# Altium PCB ad_motor3.PcbDoc
Units mil, origin at the board's own origin, x right, y up, seen from the top; angles counter-clockwise.
Board outline 2558.74 x 2204.72 mil, 2 copper layers (Top Layer, Bottom Layer); 48 components, 62 nets, 206 pads, 58 vias.
Unrouted connection lines stored in the file: 1.
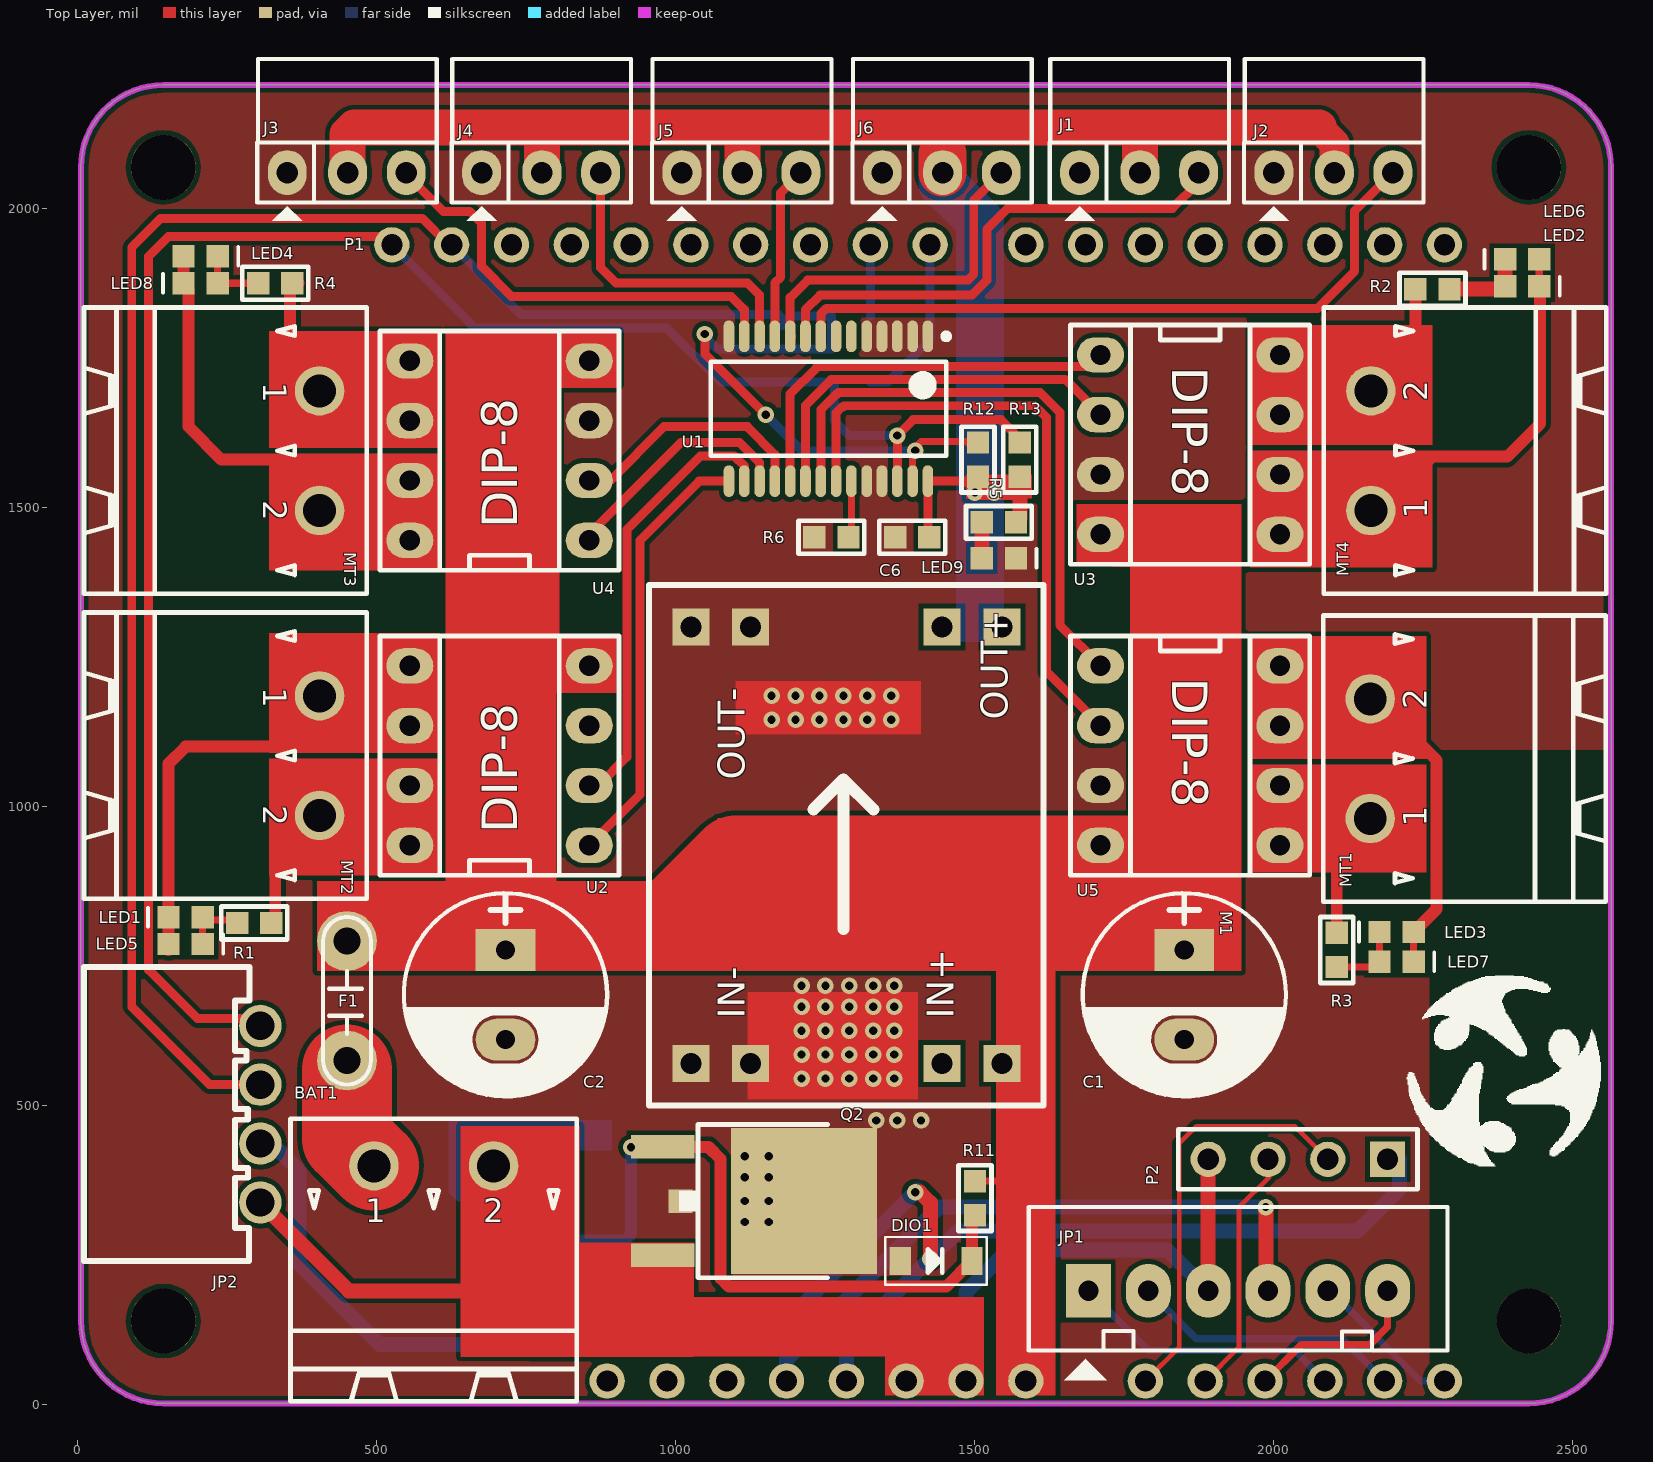
[diagram p0: Top Layer view]
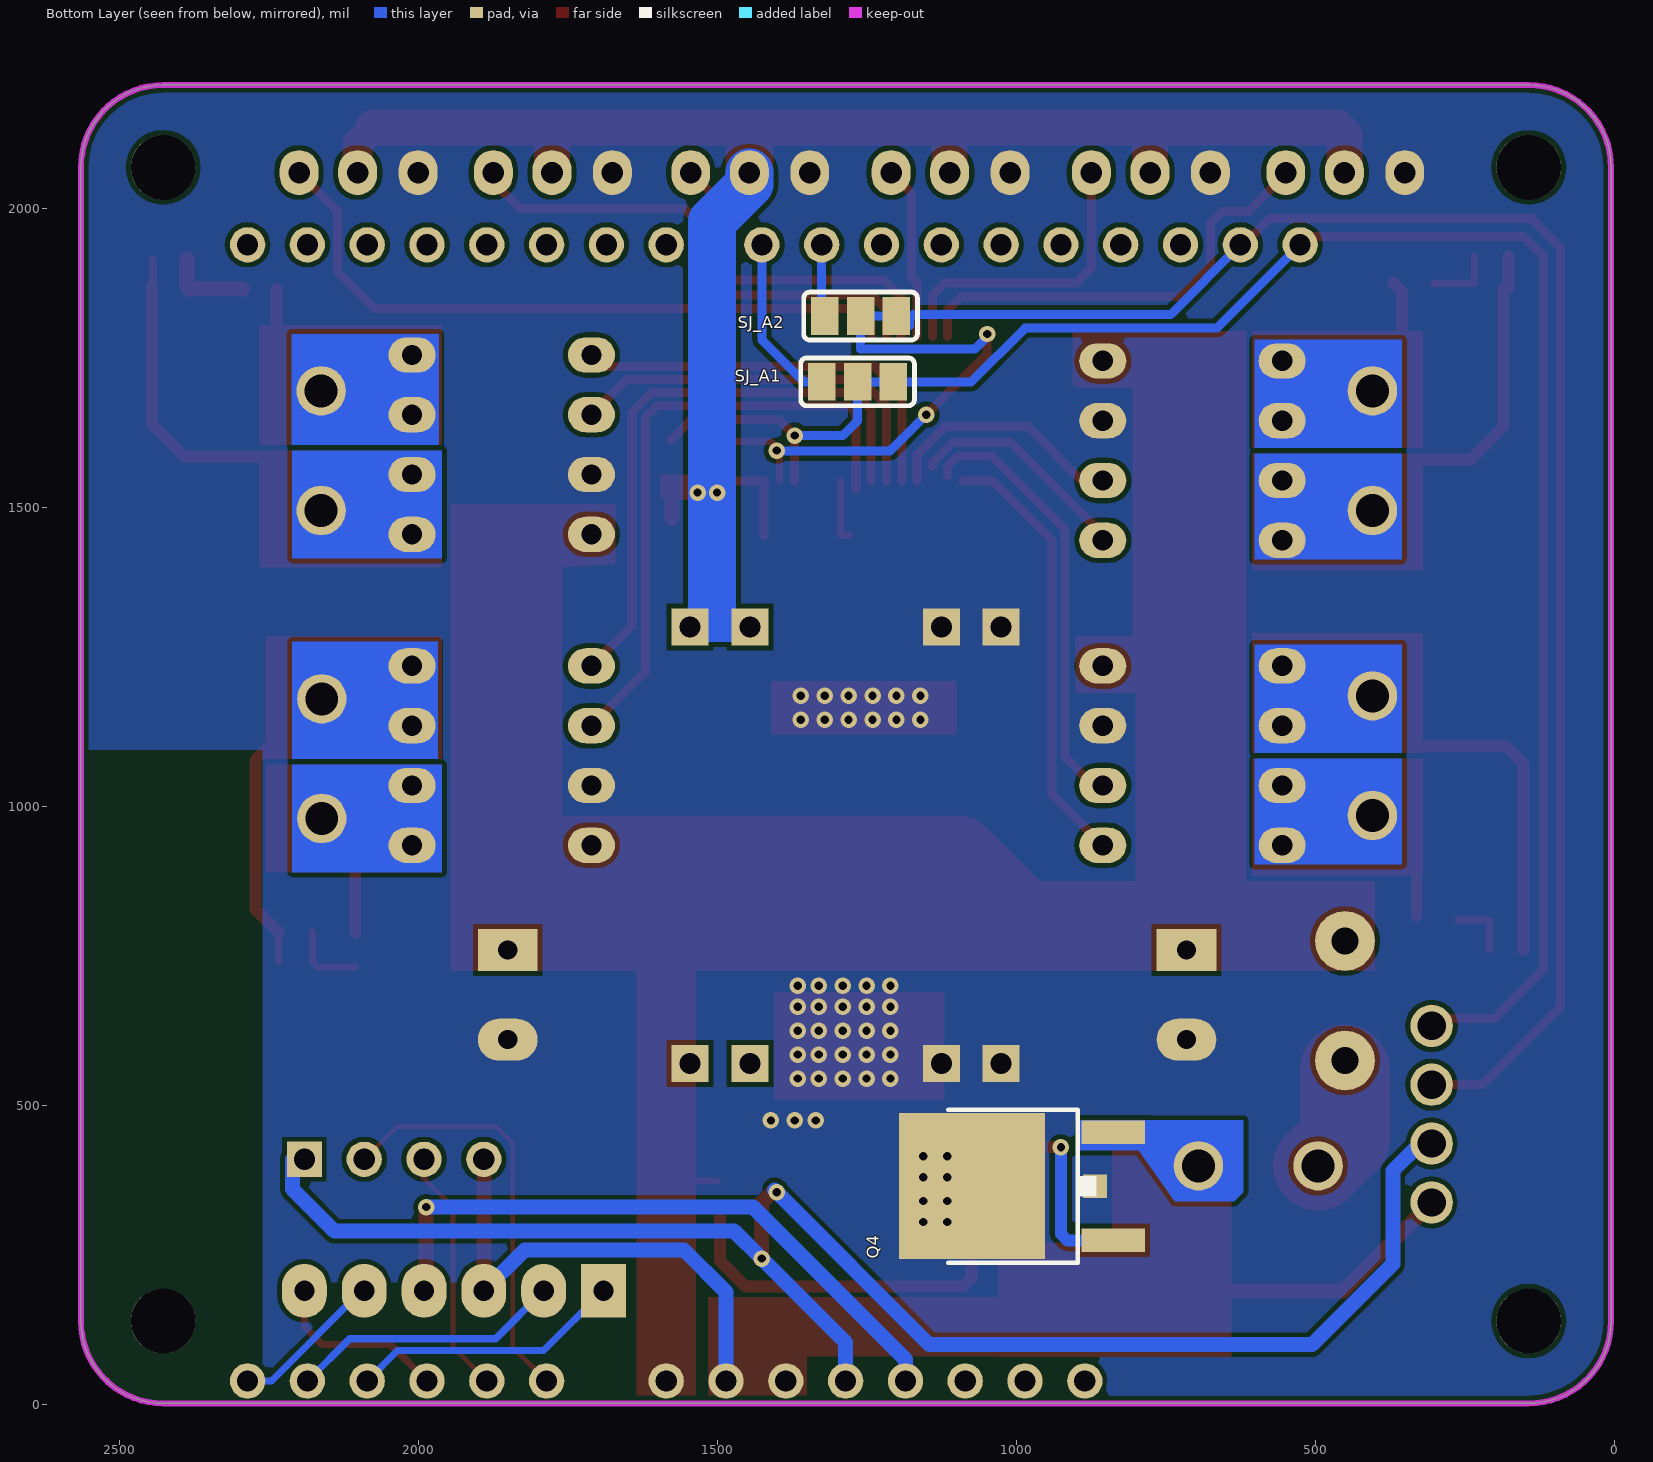
[diagram p1: Bottom Layer view, seen from below]

## Layer stack, top to bottom
Top Solder: solder mask 0.4, Solder Resist, Dk 3.5
Top Layer: signal copper 1.4
Dielectric 1: dielectric 12.6, FR-4, Dk 4.8
Bottom Layer: signal copper 1.4
Bottom Solder: solder mask 0.4, Solder Resist, Dk 3.5

## Board outline
5,139.49 ccw(c142.8,139.49) 142.8,1.69 2426.26,1.69 ccw(c2426.1,139.33) 2563.74,139.49 2563.74,2068.62 ccw(c2426.1,2068.78) 2426.26,2206.42 142.8,2206.42 ccw(c142.8,2068.62) 5,2068.62

## Design rules (kind name [scope] priority, off if disabled: settings)
Clearance Clearance_1 [InPolygon] p1: gap=8
Clearance [All] p2: gap=7
ComponentClearance ComponentClearance_1 [InComponent('p1')] p1: gap=0 collisioncheckmode=3 verticalgap=0 showdistances=FALSE
ComponentClearance [All] p2: gap=10 collisioncheckmode=3 verticalgap=10 showdistances=FALSE
PolygonConnect [All] p1: connectstyle=Direct reliefconductorwidth=20 reliefentries=4 polygonreliefangle="90 Angle" airgapwidth=10
RoutingVias [All] p1: holewidth=15 width=23 viastyle="Through Hole" minholewidth=10 minwidth=15 maxholewidth=28 maxwidth=50
SolderMaskExpansion [All] p1: expansion=4
Width [All] p1: maxlimit=150 minlimit=8 preferedwidth=12
29 further rules are at their usual default settings.

## Classes and differential pairs
component class H-brigde_connector: C1 C2 JP1 JP2 LED1 LED2 LED3 LED4 LED5 LED6 LED7 LED8 MT1 MT2 MT3 MT4 P1 P2 R1 R2 R3 R4 SJ_A1 SJ_A2 U2 U3 U4 U5
component class power: BAT1 DIO1 F1 M1 Q2 Q4 R11
component class VIA_MOTORS: C6 J1 J2 J3 J4 J5 J6 LED9 R5 R6 R12 R13 U1

## Components (designator, comment, footprint, x,y, rotation, side; value= is the part's Value field where it differs from the comment)
BAT1 "MOTOR-DC" CON2-5.08DC 495,400 r0 top locked
C1 "100uF/35V" CP1.5/3.4 1850,760 r270 top
C2 "100uF/35V" CP1.5/3.4 715,760 r270 top
C6 "Cap Semi" SMT0603 1395,1450 r0 top
DIO1 "Diode SMD" DIO-SMD-123 1435,240 r180 top
F1 "104" CN2 450,575 r90 top
J1 "EXTERN-SERVO" JP3H 1675,2060 r0 top
J2 "EXTERN-SERVO" JP3H 2000,2060 r0 top
J3 "EXTERN-SERVO" JP3H 350,2060 r0 top
J4 "EXTERN-SERVO" JP3H 675,2060 r0 top
J5 "EXTERN-SERVO" JP3H 1010,2060 r0 top
J6 "EXTERN-SERVO" JP3H 1345,2060 r0 top
JP1 "JP6" CON6 1690,190 r0 top
JP2 "JP4" CONN-TH_XH2.54-4AW 305,485.44 r90 top
LED1 "RED" SMT0603P 180,815 r180 top
LED2 "RED" SMT0603P 2415,1870 r0 top
LED3 "RED" SMT0603P 2205,790 r180 top
LED4 "RED" SMT0603P 205,1920 r0 top
LED5 "GREEN" SMT0603P 180,770 r0 top
LED6 "GREEN" SMT0603P 2415,1915 r180 top
LED7 "GREEN" SMT0603P 2205,740 r0 top
LED8 "GREEN" SMT0603P 205.12,1875 r180 top
LED9 "RED" SMT0603P 1540,1415 r0 top
M1 "MP1584-dc-brick-pcb Step down Input: 4.5V - 28V Ouput 0.8V - 25V max. 3A Cheap on ebay" "MP1584 MODULE" 1285,935 r270 top
MT1 "MOTOR-DC" CON2-5.08DC 2160,980 r90 top
MT2 "MOTOR-DC" CON2-5.08DC 405,1185 r270 top locked
MT3 "MOTOR-DC" CON2-5.08DC 405,1695 r270 top locked
MT4 "MOTOR-DC" CON2-5.08DC 2160.98,1495 r90 top locked
P1 "ArduinoHeader" ArduinoClone2 1405,989.21 r0 top locked
P2 "Header 4" HDR1X4 2190,410 r180 top
Q2 "IRFR4105ZTRPBF" TO252-3 1145,340 r270 top
Q4 "IRFR4105ZTRPBF" TO252-3 1005,365 r90 bottom
R1 "Resistor" SMT0603 295,805 r0 top
R2 "Resistor" SMT0603 2265,1865 r180 top
R3 "Resistor" SMT0603 2105,760 r270 top
R4 "Resistor" SMT0603 330.12,1875 r180 top
R5 "Resistor" SMT0603 1540,1475 r0 top
R6 "Resistor" SMT0603 1260,1450 r0 top
R11 "Resistor" SMT0603 1500,345 r90 top
R12 "Resistor" SMT0603 1505,1580 r270 top
R13 "Resistor" SMT0603 1575,1580 r270 top
SJ_A1 "SOLDERJUMPERREFLOW_NOPASTE" SOLDERJUMPER_REFLOW_NOPASTE#1 1235,1710 r0 bottom
SJ_A2 "SOLDERJUMPERREFLOW_NOPASTE" SOLDERJUMPER_REFLOW_NOPASTE#2 1230,1820 r0 bottom
U1 "PCA9685-TSSOP28" TSSOP28-SMD 1255,1665 r270 top
U2 "TA6586" DIP.100/8/W.300/L.400 705,1085 r90 top
U3 "TA6586" DIP.100/8/W.300/L.400 1860,1605 r270 top
U4 "TA6586" DIP.100/8/W.300/L.400 705,1595 r90 top
U5 "TA6586" DIP.100/8/W.300/L.400 1860,1085 r270 top

## Footprints (in the part's own frame and the unit in brackets; to place one, negate y for a bottom-side part, rotate by r counter-clockwise, add the part's x,y. Pads: shape width x height; smd on the part's side, far side on the other; paste and mask are expansions set on the pad)
ArduinoClone2 [mm] "Base for Arduino-like boards."
  round 1.5 hole 0.9: 1(-13.208,-24.13) 2(-10.668,-24.13) 3(-8.128,-24.13) 4(-5.588,-24.13) 5(-3.048,-24.13) 6(-0.508,-24.13) 7(2.032,-24.13) 8(4.572,-24.13) 9(9.652,-24.13) 10(12.192,-24.13) 11(14.732,-24.13) 12(17.272,-24.13) 13(19.812,-24.13) 14(22.352,-24.13) 15(22.352,24.13) 16(19.812,24.13) 17(17.272,24.13) 18(14.732,24.13) 19(12.192,24.13) 20(9.652,24.13) 21(7.112,24.13) 22(4.572,24.13) 23(0.508,24.13) 24(-2.032,24.13) 25(-4.572,24.13) 26(-7.112,24.13) 27(-9.652,24.13) 28(-12.192,24.13) 29(-14.732,24.13) 30(-17.272,24.13) 31(-19.812,24.13) 32(-22.352,24.13)
CN2 [mil]
  round 100 hole 45: 1(0,0) 2(200,0)
  silkscreen extent -40,-40 240,40, body extent -54,-44 260,55, height 407
CON2-5.08DC [mm] "PHOENIX MSTBA Serie, Pitch 5.08mm, 12A, 250V, 2 Positions Header"
  round 2.1 hole 1.4: 1(0,-0.025) 2(5.08,-0.025)
  silkscreen extent -3.54,-10.03 8.62,1.97, body extent -3.54,-10.02 8.62,1.98, height 8.6
CON6 [mil] "CON6"
  rect 75x90 hole 34: 1(0,0)
  oval 75x90 hole 34: 2(100,0) 3(200,0) 4(300,0) 5(400,0) 6(500,0)
  silkscreen extent -100,-150 600,140
CONN-TH_XH2.54-4AW [mm]
  round 1.8 hole 1.199: 1(-3.75,0) 2(-1.248,0) 3(1.251,0) 4(3.75,0)
  silkscreen extent -6.23,0.46 6.26,7.49, body extent -6.25,-1.48 6.25,7.32, height 6.55
CP1.5/3.4 [mil] "Tu hoa 220->470uF,16V, 470uF/16V,25V"
  rect 70x100 hole 32: 1(0,0)
  oval 70x100 hole 32: 2(150,0)
  silkscreen extent -95,-170 245,170, body extent -85,-157 230,157, height 446
DIO-SMD-123 [mm]
  rect 0.9x1.2 smd: 1(1.524,0) 2(-1.524,0)
  silkscreen extent -2.16,-1.02 2.16,1.02, body extent -1.76,-0.8 1.94,0.8, height 1.25
DIP.100/8/W.300/L.400 [mm]
  oval 1.5x2 hole 0.864: 1(-3.81,-3.81) 2(-1.27,-3.81) 3(1.27,-3.81) 4(3.81,-3.81) 5(3.81,3.81) 6(1.27,3.81) 7(-1.27,3.81) 8(-3.81,3.81)
  silkscreen extent -5.08,-5.08 5.08,5.08, body extent -5.4,-3.88 5.4,3.88, height 4.5
HDR1X4 [mm] "Connector; Header; 4 Position"
  rect 1.5x1.5 hole 0.9: 1(0,0)
  round 1.5 hole 0.9: 2(2.54,0) 3(5.08,0) 4(7.62,0)
  silkscreen extent -1.27,-1.27 8.89,1.27
JP3H [mil]
  oval 65x75 hole 36: 1(0,0) 2(101,0) 3(199,0)
  silkscreen extent -50,-81 250,190, body extent -47,-15 245,424, height 99
"MP1584 MODULE" [mil]
  rect 62x62 hole 35: 1(365,-260) 1(365,-160) 2(365,160) 2(365,260) 3(-365,160) 3(-365,260) 4(-365,-260) 4(-365,-160)
  silkscreen extent -435,-330 435,330
SMT0603 [mm]
  rect 0.95x0.95 smd: 1(-0.725,0) 2(0.725,0)
  silkscreen extent -1.4,-0.7 1.4,0.7, body extent -1.02,-0.45 1.03,0.45, height 2.65
SMT0603P [mm] "Polarized 0603 footprint"
  rect 0.95x0.95 smd: 1(-0.725,0) 2(0.725,0)
  silkscreen extent 1.6,-0.4 1.6,0.4, body extent -1.01,-0.44 1.01,0.44, height 2.65
SOLDERJUMPER_REFLOW_NOPASTE#1 [mil] "SOLDERJUMPER_REFLOW_NOPASTE"
  rect 46x63 smd: 1(-30,0) 2(30,0) 3(90,0)
  Top Layer lines w15: -30,0 30,0
  silkscreen extent -65,-40 125,40
SOLDERJUMPER_REFLOW_NOPASTE#2 [mil] "SOLDERJUMPER_REFLOW_NOPASTE"
  rect 46x63 smd: 1(-30,0) 2(30,0) 3(90,0)
  Top Layer lines w15: -30,0 25,0 30,0
  silkscreen extent -65,-40 125,40
TO252-3 [mm]
  rect 1x2.7 smd: 1(-2.3,-4.25) 3(2.3,-4.25)
  rect 6.2x6.2 smd: 2(0,1.75)
  rect 1x1.02 smd: 2(0,-3.48)
  silkscreen extent -3.25,-3.54 3.25,2.75, body extent -3.27,-4.95 3.27,4.95, height 2.51
TSSOP28-SMD [mm] "TSOP, 28-Leads, Body 9.80x4.55mm, Pitch 0.65mm, IPC Medium Density"
  oval 1.35x0.45 smd: 1(-3.075,4.225) 2(-3.075,3.575) 3(-3.075,2.925) 4(-3.075,2.275) 5(-3.075,1.625) 6(-3.075,0.975) 7(-3.075,0.325) 8(-3.075,-0.325) 9(-3.075,-0.975) 10(-3.075,-1.625) 11(-3.075,-2.275) 12(-3.075,-2.925) 13(-3.075,-3.575) 14(-3.075,-4.225) 15(3.075,-4.225) 16(3.075,-3.575) 17(3.075,-2.925) 18(3.075,-2.275) 19(3.075,-1.625) 20(3.075,-0.975) 21(3.075,-0.325) 22(3.075,0.325) 23(3.075,0.975) 24(3.075,1.625) 25(3.075,2.275) 26(3.075,2.925) 27(3.075,3.575) 28(3.075,4.225)
  silkscreen extent -3.2,-5 2,5.13, body extent -3.25,-5 3.25,5, height 1.1

## Part data
C1 C2: library part CP3, "Cap 100uF/35V - 470uF/16V"
C6: library part CAP-SM-0603-X7R-1uF, "CAP SM 0603 X7R 1uF 10%"
DIO1: "Default Diode"
F1: library part CN2, "Cap np 104 => 105pF"
JP1: library part Con6, "Connector 6"
JP2: library part Con4, "Connector 4"
LED1 LED2 LED3 LED4 LED9: library part LNJ237W82RA, "LED SM 0603 RED 1V95 FWD VOLTAGE"
LED5 LED6 LED7 LED8: library part LNJ337W83RA, "LED SM 0603 GREEN 1V95 FWD VOLTAGE"
M1: library part MP1584
P2: "Header, 4-Pin"
Q2 Q4: "RoHS Compliant"
R1 R2 R3 R4 R6 R12 R13: library part RES-SM-0603-10K, "RES SM 0603 10K"
R5: library part RES-SM-0603-1K, "RES SM 0603 1K"
R11: library part RES-SM-0603-100K, "RES SM 0603 100K"
SJ_A1 SJ_A2: "SMD Solder JUMPER   Solder the two pads together to create a connection, or remove the solder to break it.REFLOW - Use this footprint for solder paste and reflow ovens. WAVE - Use this footprint for hand-soldering (larger pads).    CLOSED - Has a trace between the two pads to ensure it is closed by default.  The trace needs to be cut to disable the jumper, and can be closed again by creating a solder bridge between the two pads."

## Free pads (board coordinates)
  round 108.27 hole 108.27: ""(142.8,139.49) ""(142.8,2068.62) ""(2426.26,139.49) ""(2426.26,2068.62)

## Via types
v1: diameter 27.56, hole 13.78, Top Layer to Bottom Layer, 58 vias

## Nets (pads, with @x,y where several pads share a name; then routed paths per layer and width w, separated by ;. In a path a pad name is that pad's centre, name@x,y a point inside that pad or via, vN(x,y) a via of type N, cw(c..) or ccw(c..) an arc to the next point about the centre after c; other vN are vias at no path point)
3.3V: JP1.4 P1.4 | length 1084.7
  Top Layer w25: v1(1986.41,330) 1986.41,194.41 1990.41,190.41 JP1.4
  Bottom Layer w25: P1.4 1185,75 1440,330 v1(1986.41,330)
5V: C6.2 J1.2 J2.2 J3.2 J4.2 J5.2 J6.2 M1.3 R5.2 R12.2 R13.2 U1.28 | length 3243.9
  Top Layer w15: C6.2@1421.34,1452.2 U1.28 R12.2@1493.74,1543.94 ; 1485,1541.46 R12.2@1505,1541.46 ; R12.2@1508.47,1541.46 1555,1541.46
  Top Layer w25: v1(1500,1524.88) v1(1532.56,1524.88) 1574.88,1524.88 1575,1525 R5.2@1575,1481.46
  Top Layer w50: 2075,2135 2101,2109 J2.2
  Top Layer w60: J3.2 451,2124 462,2135 2075,2135 ; J4.2 776,2131 ; J5.2 1111,2134 ; J1.2 1776,2131
  Top Layer w80: J6.2 J6.2@1446,2091
  Bottom Layer w50: M1.3@1445,1300 M1.3@1545,1300
  Bottom Layer w80: J6.2 1446,2040.57 1508.47,1978.1 1508.47,1321.53 1512,1318
5V_S: JP2.2 P1.5 P2.1 | length 2708.4
  Top Layer w25: v1(1400,355) 1407.87,355 1425.43,337.43 v1(1425.43,243.94)
  Bottom Layer w25: JP2.2 324.3,436.29 370,390.59 370,235 505,100 1145,100 v1@1403.93,358.93 ; P1.5 1285,103.5 v1(1425.43,243.94) 1471.5,290 2140,290 2210,360 P2.1@2210,410
ATT: JP1.5 P1.14 | length 257.5
  Bottom Layer w12: JP1.5 2094.36,190 2245.14,39.21 P1.14
CLK: JP1.6 P1.11 | length 302.6
  Top Layer w12: P1.11 2045.79,100 2160,100 2190,130 JP1.6
CMD: JP1.2 P1.13 | length 457.5
  Bottom Layer w12: JP1.2 1870,110 2114.21,110 P1.13
DATA: JP1.1 P1.12 | length 457.5
  Bottom Layer w12: JP1.1 1790,90 2034.21,90 P1.12
GND: C1.2 C2.2 C6.1 DIO1.1 J1.1 J2.1 J3.1 J4.1 J5.1 J6.1 LED9.2 M1.1 M1.4 Q2.2 Q4.2 R6.1 U1.1 U1.2 U1.3 U1.4 U1.5 U1.14 U1.24 U1.25 U2.3 U3.3 U4.3 U5.3
  other v1: 1115,305 1155,305 1115,340 1155,340 1115,380 1155,380 1115,415 1155,415 1335,475 1370,475 1410,475 1210,545 1250,545 1290,545 1330,545 1365,545 1210,585 1250,585 1290,585 1330,585 1365,585 1210,625 1250,625 1290,625 1330,625 1365,625 1210,665 1250,665 1290,665 1330,665 1365,665 1210,700 1250,700 1290,700 1330,700 1365,700 1160,1145 1200,1145 1240,1145 1280,1145 1320,1145 1360,1145 1160,1185 1200,1185 1240,1185 1280,1185 1320,1185 1360,1185
GND_R: BAT1.2 JP1.3 JP2.1 P1.6 P1.7 P2.4 Q2.3 Q4.3 | length 2288.4
  Top Layer w25: JP2.1 452.79,190 695,190 ; JP1.3 P2.4@1890,390
  Top Layer w100: BAT1.2 695,190 755,130 1415,130 1425,120 1425,73.69
  Bottom Layer w25: P1.7 1485,188 1555,258 1822,258 JP1.3 JP1.3@1878.11,190
IO0: P1.18
IO2: P1.17
IO4: P1.19
IO5: P1.25
IO16: P1.29
IO17: P1.30
IO18: P1.28
IO19: P1.27
IO21: P1.24 SJ_A2.3 | length 119.2
  Bottom Layer w15: SJ_A2.3@1325,1820 P1.24
IO22: P1.23 SJ_A1.3 | length 288.2
  Bottom Layer w15: SJ_A1.3 1355,1710 1425,1780 P1.23
IO23: P1.26
IO25: P1.20
IO26: P1.21
IO27: P1.22
IO34: P1.15
IO35: P1.16
IO36: P1.9 P2.2 | length 703.8
  Top Layer w8: P1.9 1841.5,95.71 1841.5,436.5 1870,465 2035,465 P2.2
IO39: P1.10 P2.3 | length 416.8
  Top Layer w8: P1.10 1941.5,95.71 1941.5,329.73 1991.77,380 1990,380 P2.3
M1_OUT_A: LED1.2 LED5.1 MT2.1 U2.5 U2.6 | length 516.8
  Top Layer w20: LED5.1@151.46,760 151.46,1071.46 180,1100 330,1100 330,1115
M1_OUT_B: MT2.2 R1.2 U2.7 U2.8 | length 103.5
  Top Layer w20: R1.2@330,816.46 330,920
M2_OUT_A: MT3.1 R4.1 U4.5 U4.6 | length 139.8
  Top Layer w20: 365,1745 355,1755 355,1861.46 R4.1@368.54,1875
M2_OUT_B: LED4.1 LED8.2 MT3.2 U4.7 U4.8 | length 482.7
  Top Layer w20: LED8.2@176.46,1866.34 LED4.1 ; LED8.2@185,1865 185,1635 240,1580 340,1580 355,1565
M3_OUT_A: LED2.2 LED6.1 MT4.1 U3.5 U3.6 | length 534.4
  Top Layer w12: LED2.2 LED6.1
  Top Layer w20: 2225,1545 2265,1585 2390,1585 2445,1640 LED2.2@2445,1870
M3_OUT_B: MT4.2 R2.2 U3.7 U3.8 | length 148.5
  Top Layer w20: 2236.46,1716.46 R2.2
M4_OUT_A: MT1.1 R3.1 U5.5 U5.6 | length 132.7
  Top Layer w20: R3.1 2105,905 ; 2200,960 2211.46,948.54
M4_OUT_B: LED3.1 LED7.2 MT1.2 U5.7 U5.8 | length 461.5
  Top Layer w12: LED7.2 LED3.1
  Top Layer w20: 2220,1130 2220,1095 2237.02,1112.02 2272,1077.04 2272,828.46 LED3.1
MOTOR1_A: U1.15 U2.1 | length 734.9
  Top Layer w15: U2.1 940,1020 940,1445 1038.94,1543.94 U1.15
MOTOR1_B: U1.16 U2.2 | length 731.1
  Top Layer w15: U2.2 870,1035 918,1083 918,1463 1041.27,1586.27 1097.47,1586.27 ; 1098.73,1585.01 1114.25,1569.49 U1.16@1114.25,1553.74
MOTOR2_A: U1.17 U4.1 | length 376.7
  Top Layer w15: U4.1 855,1455 1008.27,1608.27 1106.58,1608.27 ; 1107.84,1607.01 1140,1574.85 U1.17@1140,1568.74
MOTOR2_B: U1.18 U4.2 | length 410.9
  Top Layer w15: U4.2 890,1545 980,1635 1120,1635 ; 1120,1633.74 1165.43,1588.31 U1.18
MOTOR3_A: U1.19 U3.1 | length 702.4
  Top Layer w15: U1.19 1191.02,1689.76 1236,1734.74 ; 1236,1736 1710,1736 U3.1
MOTOR3_B: U1.20 U3.2 | length 626.4
  Top Layer w15: U1.20 1216.61,1670.35 1259,1712.74 ; 1259,1714 1651,1714 U3.2@1685,1680
MOTOR4_A: U1.21 U5.1 | length 997.1
  Top Layer w15: U1.21 1242.2,1663.63 1268.57,1690 1270,1690 1272,1692 1609.11,1692 1642,1659.11 1642,1303 U5.1
MOTOR4_B: U1.22 U5.2 | length 1045.8
  Top Layer w15: U1.22@1267.8,1530 U1.22 1267.8,1658.11 1277.69,1668 1279.11,1668 1281.11,1670 1600,1670 1620,1650 1620,1225 U5.2
NetBAT1_1: BAT1.1 F1.1 | length 179.6
  Top Layer w150: F1.1@450,560 450,444.02 BAT1.1
NetDIO1_2: DIO1.2 Q2.1 Q4.1 R11.1 | length 1109.6
  Top Layer w20: v1(925,430) 925.55,430.55 Q2.1 1054.45,430.55 1074.85,410.15 1074.85,210.91 1088.76,197 1452,197 DIO1.2 R11.1@1495,311.46
  Bottom Layer w20: Q4.1 914.3,274.45 925,285.15 v1(925,430)
NetLED1_1: LED1.1 LED5.2 R1.1 | length 102.9
  Top Layer w12: LED5.2@208.54,760 208.54,810 R1.1@261.46,810
NetLED2_1: LED2.1 LED6.2 R2.1 | length 140
  Top Layer w25: R2.1 2381.46,1865 LED2.1 LED6.2
NetLED3_2: LED3.2 LED7.1 R3.2 | length 125
  Top Layer w12: R3.2 2167.91,731.46 LED7.1 LED3.2
NetLED4_2: LED4.2 LED8.1 R4.2 | length 112.8
  Top Layer w12: LED8.1@233.54,1875.12 LED4.2 ; LED8.1 R4.2
NetLED9_1: LED9.1 R5.1 | length 60
  Top Layer w25: LED9.1 R5.1
NetR6_2: R6.2 U1.23 | length 104.5
  Top Layer w12: R6.2@1278.54,1453.54 1292.09,1453.54 1293.39,1454.84 U1.23
S_CL: JP2.4 P1.32 SJ_A1.1 | length 2603
  Top Layer w15: JP2.4@293.09,645 200.06,645 118.26,726.8 118.26,1919.71 151.75,1953.2 511.01,1953.2 P1.32
  Bottom Layer w15: P1.32 664.21,1800 985,1800 1075,1710 SJ_A1.1
S_DA: JP2.3 P1.31 SJ_A2.1 | length 2727.7
  Top Layer w15: JP2.3 220.31,534.69 90,665 90,1935 138.24,1983.24 575.65,1983.24 619.67,1939.21 P1.31
  Bottom Layer w15: P1.31 741.73,1822.48 1171.37,1822.48 1178,1815.85 SJ_A2.1@1178,1804.44
SCL: R13.1 SJ_A1.2 U1.26 | length 489
  Top Layer w15: U1.26 v1(1370.16,1620.16) 1396.74,1646.74 1543.26,1646.74 R13.1@1577.33,1612.67
  Bottom Layer w15: SJ_A1.2 1265,1645 1289.84,1620.16 v1(1370.16,1620.16)
SDA: R12.1 SJ_A2.2 U1.27 | length 889.6
  Top Layer w12: U1.27 v1@1395.75,1595 ; v1@1397.5,1597.5 1410,1610 1487.28,1610 R12.1@1495,1602.28
  Top Layer w15: v1(1048.31,1790) 1048.31,1756.69 v1(1150,1655)
  Bottom Layer w15: v1(1048.31,1790) 1048.31,1785 1068.31,1765 1260,1765 SJ_A2.2 ; v1(1150,1655) 1210.84,1594.16 1399.16,1594.16 v1(1400,1595)
SERVO_1: J5.3 U1.11 | length 292
  Top Layer w15: U1.11 1165.43,1875.43 1175,1885 1175,2026 J5.3
SERVO_2: J6.3 U1.10 | length 579.4
  Top Layer w15: U1.10@1193.26,1786.06 U1.10 1191.02,1851.02 1220,1880 1488,1880 1498,1890 1498,2014 J6.3
SERVO_3: J4.3 U1.12 | length 512.9
  Top Layer w15: J4.3 874,1901 900,1875 1120,1875 1139.84,1855.16 U1.12
SERVO_4: J3.3 U1.13 | length 758.2
  Top Layer w15: J3.3 549,2041 565,2041 611,1995 655,1995 675,1975 675,1903 725,1853 1092,1853 1114.25,1830.75 U1.13
SERVO_6: J2.3 U1.8 | length 1151.4
  Top Layer w15: U1.8 1242.2,1823.59 1251.61,1833 2073,1833 2135,1895 2135,1996 J2.3
SERVO_7: J1.3 U1.9 | length 866
  Top Layer w15: U1.9 1216.61,1830.43 1241.19,1855 1495,1855 ; 1485,1855 1495,1855 ; J1.3 1874,2044 1830,2000 1555,2000 1520,1965 1520,1880 1495,1855
VIN: C1.1 C2.1 F1.2 M1.2 P1.8 R11.2 U2.4 U3.4 U4.4 U5.4 | length 2172.6
  Top Layer w12: R11.2 1573.54,373.54
  Top Layer w100: 1585,80 1585,760
  Top Layer w150: F1.2@476.53,800 990,800 1100,910 1850,910
pads on no net: P1.1 P1.2 P1.3 U1.6 U1.7

## Polygon pours and split planes (outlines as drawn)
GND on Bottom Layer "Bottom Layer-No Net" (solid, remove dead copper, pour order 2): 0,2219.8 2565,2219.8 2565,9.8 0,9.8
GND on Top Layer "Bottom Layer-No Net" (solid, remove dead copper, pour order 0): -15,2210 2560,2210 2560,-15 -5,-15

## Keep-outs
Keep-Out Layer:
  the board outline again, w10

## Other copper
Top Layer:
  region net GND_R: 1515,180 1350,180 1350,15 1515,15
  region net VIN: 1635,125 1535,125 1535,15 1635,15
  rectangle net 5V: 1485,1515 1595,1555
  region net GND: 1410,1210 1100,1210 1100,1120 1410,1120
  region net GND: 1405,690 1120,690 1120,510 1405,510
  pour cut-out: 2560,0 2295,0 2260,35 2260,1095 2300,1095 2315,1095 2560,1095
  region net GND_R: 640,465 839.37,465 839.37,445.63 839.37,270 987.98,270 1000,270 1030,270 1030,80 640,80
  region net M3_OUT_B: 1960,1805 1960,1605 2265,1605 2265,1805
  region net M3_OUT_A: 1960,1595 2265,1595 2265,1400 1960,1400
  region net M4_OUT_B: 1960,1285 1960,1080 2245,1080 2255,1080 2255,1285
  region net M4_OUT_A: 1960,1070 2250,1070 2255,1070 2255,1055 2255,890 1960,890
  region net M1_OUT_A: 605,1090 605,1290 320,1290 320,1090
  region net M1_OUT_B: 605,885 605,1080 330,1080 320,1080 320,885
  region net M2_OUT_B: 605,1395 605,1590 330,1590 320,1590 320,1395
  region net M2_OUT_A: 605,1600 605,1795 320,1795 320,1600
  region net VIN: 905,1795 905,1705 900,1700 805,1700 805,1597.5 805,1285 900,1285 900,1190 800,1190 800,875 860.36,875 860.36,725 400,725 400,800 400,875 615,875 615,1795
  region net VIN: 1945,1505 1670,1505 1670,1415 1670,1405 1760,1400 1760,980 1070,980 1020,855 990,725 1945,725 1945,740 1945,770
Bottom Layer:
  pour cut-out: 2560,0 2295,0 2260,35 2260,1095 2300,1095 2315,1095 2560,1095
  region net M1_OUT_A: 355,1090 355,1270 601.25,1270 601.25,1090
  region net M2_OUT_B: 355,1413.1 355,1590 601.25,1590 601.25,1413.1
  region net M2_OUT_A: 355,1600 355,1780 601.25,1780 601.25,1600
  region net M1_OUT_B: 355,903.1 355,1080 601.25,1080 601.25,903.1
  region net M3_OUT_B: 1965,1605 1965,1790 2211.25,1790 2211.25,1605
  region net M3_OUT_A: 1960,1415 1960,1595 2210,1595 2210,1415
  region net M4_OUT_B: 1966.87,1080 1966.87,1275 2210,1275 2210,1080
  region net M4_OUT_A: 1960,890 1960,1070 2210,1070 2210,890
  region net GND_R: 892.53,475 892.53,425 795,425 735.03,340 635.03,340 620.03,355 620.03,475

## Silkscreen, mask and mechanical layers (free items; w line width, h text height)
Top Overlay:
  drawing of 457 lines, arcs and shapes, not listed

## Text inside footprints (layer, text, board x,y; h text height)
BAT1: Top Overlay "2" at 677.68,304.53 h39.37; Top Overlay "1" at 480.83,304.53 h39.37
M1: Top Overlay "IN+" at 1480,645 h77.5 r90; Top Overlay "IN-" at 1130,645 h77.5 r90; Top Overlay "OUT+" at 1570,1145 h77.5 r90; Top Overlay "OUT-" at 1130,1045 h77.5 r90
MT1: Top Overlay "2" at 2255.47,1162.68 h39.37 r90; Top Overlay "1" at 2255.47,965.83 h39.37 r90
MT2: Top Overlay "2" at 309.53,1002.32 h39.37 r270; Top Overlay "1" at 309.53,1199.17 h39.37 r270
MT3: Top Overlay "2" at 309.53,1512.32 h39.37 r270; Top Overlay "1" at 309.53,1709.17 h39.37 r270
MT4: Top Overlay "2" at 2256.46,1677.68 h39.37 r90; Top Overlay "1" at 2256.46,1480.83 h39.37 r90
U2: Top Overlay "DIP-8" at 735,955 h59.05 r90
U3: Top Overlay "DIP-8" at 1830,1735 h59.05 r270
U4: Top Overlay "DIP-8" at 735,1465 h59.05 r90
U5: Top Overlay "DIP-8" at 1830,1215 h59.05 r270